# Altium PCB BLDC-2020.PcbDoc (part 2 of 3)
Units mil, origin at the board's own origin, x right, y up, seen from the top; angles counter-clockwise.
Board outline 3000 x 7500 mil, 4 copper layers (Top Layer, GND, Power, Bottom Layer), stack 26.468 mil thick; 202 components, 138 nets, 710 pads, 30 vias.
Unrouted connection lines stored in the file: 399.
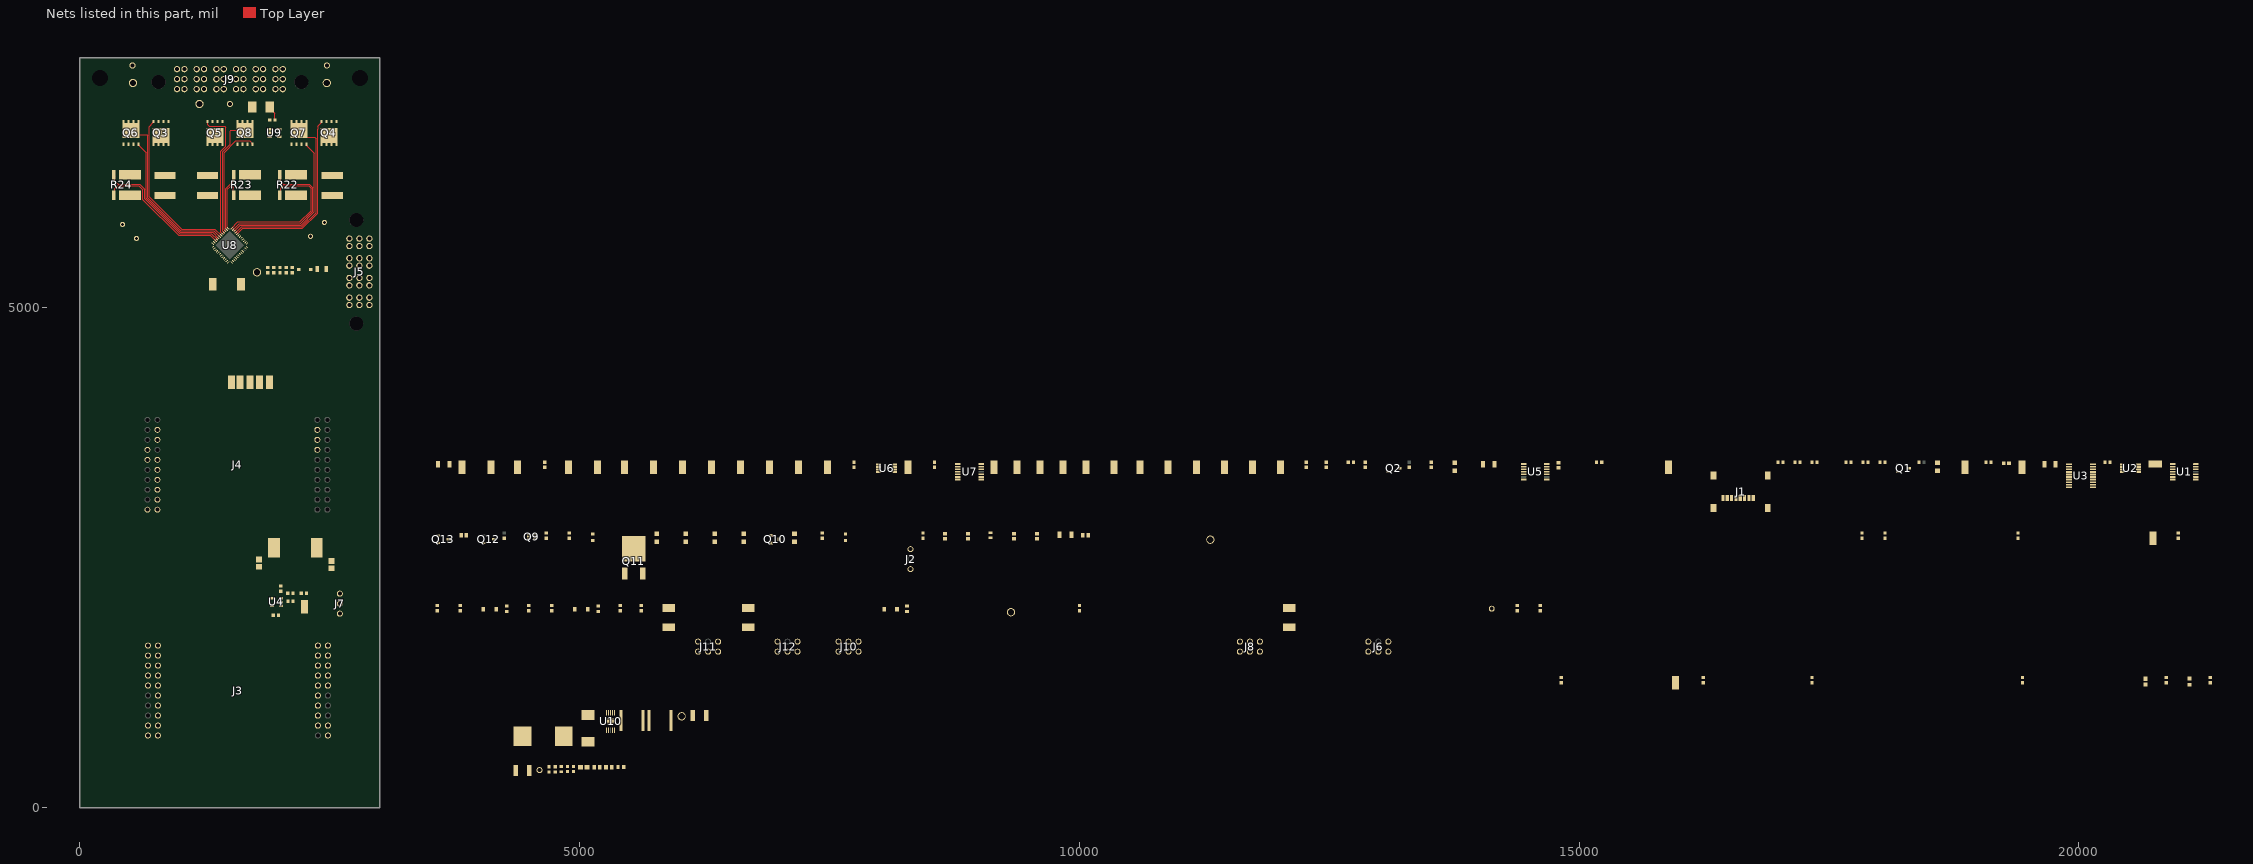
[diagram p3: the nets of this part, all layers, seen from the top]

## Part data (continued)
C27 C28: library part CMP-2000-05259-1, "CAP, Ceramic, 100 uF, 20%, 6.3 V, 1210, RoHS, Tape and Reel", Dielectric=X5R, Manufacturer=MurataElectronics, Operating Temperature=-55to85degC, Package/Case=1210, Package Description="2-Pin Surface Mount Device, Body 3.2 x 2.5 mm", Tolerance=20%, Voltage=6.3Vdc, Capacitance Value=100uF, Category=CapacitorCeramicMultilayer, ClassName="5V Regulator", Construction=Flat, Datasheet URL=https://datasheet.ciiva.com/29199/455114-da-01-en-vs-kondensator-1210-29199468.pdf, Datasheet Version=Dec-10, Manufacturer URL=http://www.murata.com/, Mounting=SurfaceMount, Package Reference=1210, Product Depth=2.5mm, Product Height=2.5mm, Product Length=3.2mm, Rad Hard=No, Type=Flat
C29 C30: library part CMP-2000-06059-1, "Chip Capacitor, 10 uF, +/- 20%, 100 V, -55 to 125 degC, 2220 (5750 Metric), RoHS, Tape and Reel", Capacitance=10µF, Manufacturer=TDK, Operating Temperature=-55°C~125°C, Package / Case=2220(5750Metric), Package Description="SMD, 2-Leads, Body 6.1 x 5.4 mm", Package Reference=C5750-2, PCN Part Number=MLCCPartNumberChange30/Nov/2012, Ratings=-, Standard Package=1, Temperature Coefficient=X7S, Tolerance=±20%, Voltage - Rated=100V, Applications=GeneralPurpose, Catalog Drawings=CSERIES_2220_2.5, Category=Capacitors, ClassName="5V Regulator", Datasheet URL=https://datasheet.ciiva.com/24216/c5750x7s2a106m230kb-265716-24216594.pdf, Datasheet Version=09/2013, Family=CeramicCapacitors, Featured Product=Compact,High-CapacitanceMultilayerCeramicChipCapacitorsMidVoltageX7S-100VMLCCsC-SeriesMidVoltageMLCCs, Features=-, Height - Seated (Max)=-, Kits=445-9009-KIT-ND-KITCAPCERHICAP100V-630VSMDSAMPLEKIT1008-ND-KITCAPCERMLCC100V-630V, Lead Spacing=-, Lead Style=-, Manufacturer URL=http://www.tdk.com/, Mounting Technology=SurfaceMount, Mounting Type=SurfaceMount,MLCC, Online Catalog=CSeries,MidVoltage, Other Names=445-5212-1, Packaging=CutTape(CT), Product Training Modules=SEAT,CCV,andTVCLDesignToolsCSeriesMidVoltageCapacitorsFamilyGuidetoReplacinganElectrolyticCapacitorwithanMLCC, RoHS Information=RoHSCertificate-MLCC, Series=C, Size / Dimension="0.224\"Lx0.197\"W(5.70mmx5.00mm)", Thickness (Max)="0.098\"(2.50mm)"
C32: library part CMP-2006-02483-1, Manufacturer=Murata, Part Number=GRM188R72A472KA01D, ClassName="5V Regulator"
C33: library part CMP-2006-02064-1, Manufacturer="AVX Interconnect / Elco", Part Number=06035C271KAT2A, ClassName="5V Regulator"
C34 C35: library part EGPD800ELL391MK25H, "CAP ALUM 390UF 20% 80V RADIAL", Case/Package=Radial, ESR (Equivalent Series Resistance)=52mR, Manufacturer 1="United Chemi-Con", Max Operating Temperature=135°C, Min Operating Temperature=-40°C, Package Quantity=1000, Ripple Current=2.05A, Tolerance=20%, Voltage Rating=80V, Capacitance=390uF, ComponentLink1Description=https://datasheet.ciiva.com/31836/76cat-db-al-cgieejppdfnamegpd-cgieejppdfnamegpd-31836902.pdf?src-supplier=Onlinecomponents.com, ComponentLink1URL=https://datasheet.ciiva.com/31836/76cat-db-al-cgieejppdfnamegpd-cgieejppdfnamegpd-31836902.pdf?src-supplier=Onlinecomponents.com, Diameter=12.5mm, Height=12.5mm, Height - Seated (Max)=1.043inch, Lead/Base Style=Straight, Lead Pitch=0.197inch, Length=25mm, Life (Hours)=3000Hour, Manufacturer Part Number 1=EGPD800ELL391MK25H, Mount="Through Hole", Packaging=Bulk, Pricing 1="1=1.62000, 10=1.28300, 100=0.96200, 500=0.72684, 1000=0.64133, 2500=0.59857, 5000=0.58147 (USD)", RoHS=Yes, Stock 1=4261, Supplier 1=Digi-Key, Termination=Radial, Voltage Rating (DC)=80V, Width=12.5mm
C36 C37: library part CMP-2007-01021-1, Manufacturer=Kemet, Part Number=C0805C226M9PAC7800
C38 C39 C40: library part C0603C473K5RACTU, "Multilayer Ceramic Capacitor, C Series, 0.047 - F, - 10%, X7R, 50 V, 0603 [1608 Metric] ;RoHS Compliant: Yes", Case/Package=0603, Case Code (Metric)=1608, Dielectric=X7R, Dielectric Material=Ceramic, Manufacturer 1=KEMET, Max Operating Temperature=125°C, Min Operating Temperature=-55°C, Package Quantity=1, Tolerance=10%, Voltage=50V, Capacitance=47nF, Case Code (Imperial)=0603, ComponentLink1Description=https://datasheet.ciiva.com/6074/1776093-6074329.pdf?src-supplier=Farnell, ComponentLink1URL=https://datasheet.ciiva.com/6074/1776093-6074329.pdf?src-supplier=Farnell, ComponentLink2Description=https://datasheet.ciiva.com/28682/1851736-28682298.pdf?src-supplier=Element14, ComponentLink2URL=https://datasheet.ciiva.com/28682/1851736-28682298.pdf?src-supplier=Element14, ComponentLink3Description=https://datasheet.ciiva.com/7823/1776093-7823803.pdf?src-supplier=Element14, ComponentLink3URL=https://datasheet.ciiva.com/7823/1776093-7823803.pdf?src-supplier=Element14, ComponentLink4Description=https://datasheet.ciiva.com/18193/getdatasheetpartid-94279-18193115.pdf?src-supplier=Verical, ComponentLink4URL=https://datasheet.ciiva.com/18193/getdatasheetpartid-94279-18193115.pdf?src-supplier=Verical, ComponentLink5Description=https://datasheet.ciiva.com/7823/1776093-7823804.pdf?src-supplier=Element14, ComponentLink5URL=https://datasheet.ciiva.com/7823/1776093-7823804.pdf?src-supplier=Element14, Depth=0.8mm, Dissipation Factor=2.5%, Height=0.8mm, Lead Pitch=0.7mm, Length=1.6mm, Manufacturer Part Number 1=C0603C473K5RACTU, Mount="Surface Mount,PCB", Number of Pins=2, Packaging="Tape and Reel", Pricing 1="1=0.12000, 10=0.08800, 100=0.04130, 500=0.02896, 1000=0.02397 (USD)", Radiation Hardening=No, REACH SVHC="No SVHC", RoHS=Yes, Stock 1=340857, Supplier 1=Digi-Key, Termination=SMD/SMT, Thickness=0.034inch, Voltage Rating=50V, Voltage Rating (DC)=50V, Width=0.8mm
D1: library part CMP-1060-00146-1, "3 W Zener Voltage Regulator, 2-Pin SMB, Pb-Free, Tape and Reel", Manufacturer="On Semiconductor", ClassName=FETBridge, ComponentLink1Description="Manufacturer URL", ComponentLink1URL=http://www.onsemi.com/, ComponentLink2Description=Datasheet, ComponentLink2URL=http://www.onsemi.com/pub_link/Collateral/1SMB5913BT3-D.PDF, ComponentLink3Description="Package Specification", ComponentLink3URL=http://www.onsemi.com/pub_link/Collateral/1SMB5913BT3-D.PDF, DatasheetVersion="Rev. 8", Mounting Technology="Surface Mount", PackageDescription="2-Pin Small Molded Package, J-Bend Lead, Body 4.33 x 3.625 mm", PackageReference=SMB-2-403A-03_H, PackageVersion="Rev. H, 05/2011", Packing="Tape and Reel", PartNumber=1SMB5936BT3G, RoHS=Pb-Free, VZ Typ (V)=30
D2: "NEXPERIA - PMEG6010CEH,115 - DIODE, SCHOTTKY, 1A, 60V, SOD-123F", Manufacturer 1=Nexperia, ClassName="3.3V Regulator", ComponentLink1Description=https://www.mouser.com/ds/2/302/PMEG6010CEH_PMEG6010CEJ-102368.pdf?src-supplier=Mouser, ComponentLink1URL=https://www.mouser.com/ds/2/302/PMEG6010CEH_PMEG6010CEJ-102368.pdf?src-supplier=Mouser, ComponentLink2Description=http://www.farnell.com/datasheets/109684.pdf?src-supplier=Farnell, ComponentLink2URL=http://www.farnell.com/datasheets/109684.pdf?src-supplier=Farnell, ComponentLink3Description=https://assets.nexperia.com/documents/data-sheet/PMEG6010CEH_PMEG6010CEJ.pdf?src-supplier=Digi-Key, ComponentLink3URL=https://assets.nexperia.com/documents/data-sheet/PMEG6010CEH_PMEG6010CEJ.pdf?src-supplier=Digi-Key, Manufacturer Part Number 1=PMEG6010CEH,115, Pricing 1="1=0.46000, 10=0.34400, 100=0.21410, 500=0.14650, 1000=0.11269 (USD)", RoHS=No, Stock 1=154416, Supplier 1=Digi-Key
D3: library part CMP-2000-05889-1, "High Voltage Schottky Barrier Rectifier, 100 V, 3 A, -55 to 125 degC, 2-Pin SMD, RoHS, Tape and Reel", If - Forward Current=3A, Ifsm - Forward Surge Current=100A, Ir - Reverse Current=500uA, Manufacturer=DiodesIncorporated, Maximum Operating Temperature=+125C, Minimum Operating Temperature=-55C, Operating Temperature Range=-55Cto+125C, Package / Case=SMC, Package Description="2-Pin Surface Mount Device, Body 5.905 x 6.855 mm", Vf - Forward Voltage=0.79V, Vrrm - Repetitive Reverse Voltage=100V, Brand=DiodesIncorporated, ClassName="5V Regulator", Configuration=Single, Datasheet URL=http://www.diodes.com/_files/datasheets/ds30020.pdf, Datasheet Version="Rev. 13-2, 09/2010", Factory Pack Quantity=3000, Height=2.5mm, Length=7.11mm, Manufacturer URL=http://www.diodes.com/, Mounting Style=SMD/SMT, Mounting Technology=SurfaceMount, Package Reference=SMC, Packaging=Reel, Product=SchottkyDiodes, Product Category=SchottkyDiodes&Rectifiers, RoHS=True, Series=B3100, Technology=Si, Termination Style=SMD/SMT, Type=SchottkyBarrierRectifier, Unit Weight=0.007408oz, Width=6.22mm
D4 D5 D6: library part CMP-1060-00363-1, "Zener Voltage Regulator, 500 mW, 2-Pin SOD-123, Pb-Free, Tape and Reel", Manufacturer="On Semiconductor", ComponentLink1Description="Manufacturer URL", ComponentLink1URL=http://www.onsemi.com/, ComponentLink2Description=Datasheet, ComponentLink2URL=http://www.onsemi.com/pub_link/Collateral/MMSZ5221BT1-D.PDF, ComponentLink3Description="Package Specification", ComponentLink3URL=http://www.onsemi.com/pub_link/Collateral/425-04.PDF, DatasheetVersion="Rev. 12", Mounting Technology="Surface Mount", PackageDescription="2-Pin SOD, Body 1.6 x 2.69 mm", PackageReference=SOD-123-2-425-04, PackageVersion="Rev. G, 10/2009", Packing="Tape and Reel", PartNumber=MMSZ5226BT1G, P Max (W)=0.5, RoHS=Pb-Free, VZ Typ (V)=3.3
F1: library part CMP-2000-06806-1, "PolySwitch Resettable Device, 6 V, 1.5 A, -40 to 85 degC, 2-Pin SMD, RoHS, Tape and Reel", Manufacturer=TEConnectivity/CircuitProtection, Maximum Current Rating=100A, Maximum Initial Resistance=N/A, Maximum Post Trip Resistance=0.11Ohm, Maximum Voltage Rating=6VDC, Minimum Initial Resistance=0.04Ohm, Operating Temperature=85(Max)C, Package/Case=1206, Package Description="2-Pin Surface Mount Device, Body 3.2 x 1.585 mm", Package Reference=NANOSMDC150F-2, Trip Current=3A, Typical Power Dissipation=0.8(Max)W, Agency Approvals=CSA,TUV,UL, Applications=N/A, Datasheet URL=http://www.te.com/commerce/DocumentDelivery/DDEController?Action=showdoc&DocId=Catalog+Section%7FCLP00010%7FA%7Fpdf%7FEnglish%7FENG_CS_CLP00010_A_CLP00010.pdf%7FRF1359-000, Datasheet Version=11/2013, Dimension=3.4(Max)x1.8(Max)x0.89(Max)mm, Family=NANOSMD, Hold Current=1.5A, Lead Diameter=N/R, Manufacturer URL=http://www.te.com/, Maximum Trip Time=0.3@8As, Mounting=SurfaceMount, Mounting Technology=SurfaceMount, Number of Terminals=2, Packaging=TapeandReel, Part No=NANOSMDC150F-2, RoHS=Yes, Seated Plane Height=N/R, Terminal Pitch=N/A, Wire Form=N/R
F2 F3 F4: library part CMP-2000-05631-1, "Fuse, 125 V, 500 mA, -55 to 125 degC, 2-Pin SMD, RoHS, Tape and Reel", Current Rating=0.5A, Manufacturer=Littelfuse, Operating Temp Range=-55to+125°C, Package Description="2-Pin Surface Mount Device, Body 6.1 x 2.69 mm", Package Reference=45X, Working Voltage-Max=125V, Datasheet URL=http://www.littelfuse.com/products/fuses/surface-mount-fuses/nano-2-fuses/~/media/electronics/datasheets/fuses/littelfuse_fuse_451_453_datasheet.pdf.pdf, Datasheet Version=02/2016, Manufacturer URL=http://www.littelfuse.com/, Mounting Technology=SurfaceMount, Response Characteristic=VeryFastActing, Size=6.10x2.69mm
J1: library part CMP-1502-00164-1, "WR-CRD Micro SD Card Connector, Hinge Type", Manufacturer="Wurth Elektronik", Operating Temperature=-25to85degC, Rated Current=0.5A, Withstanding Voltage=500VAC, Working Voltage=100VAC, Datasheet URL=https://katalog.we-online.de/em/datasheet/693072010801.pdf, Manufacturer URL=http://www.we-online.de, Mounting Technology=SMT, Package Reference=693072010801, Packaging=TapeandReel, Part Number=693072010801, Publisher=WurthElektronik
J2 J7: "CONN HEADER R/A 3POS 2.54MM", Manufacturer 1=Samtec, Max Current Rating=7.4A, Max Operating Temperature=125°C, Max Voltage Rating (AC)=675V, Min Operating Temperature=-55°C, ComponentLink1Description=http://www.farnell.com/datasheets/2607185.pdf?src-supplier=Farnell, ComponentLink1URL=http://www.farnell.com/datasheets/2607185.pdf?src-supplier=Farnell, ComponentLink2Description=http://components.arrow.com/part/dataview/0323_03818136?src-supplier=Arrow+Europe, ComponentLink2URL=http://components.arrow.com/part/dataview/0323_03818136?src-supplier=Arrow+Europe, ComponentLink3Description=http://www.samtec.com/documents/webfiles/pdf/ipl1.pdf?src-supplier=Avnet+Europe, ComponentLink3URL=http://www.samtec.com/documents/webfiles/pdf/ipl1.pdf?src-supplier=Avnet+Europe, ComponentLink4Description=http://www.samtec.com/documents/webfiles/pdf/ipl1.pdf?src-supplier=Avnet, ComponentLink4URL=http://www.samtec.com/documents/webfiles/pdf/ipl1.pdf?src-supplier=Avnet, ComponentLink5Description=http://www.farnell.com/datasheets/2607185.pdf?src-supplier=Newark, ComponentLink5URL=http://www.farnell.com/datasheets/2607185.pdf?src-supplier=Newark, ComponentLink6Description=http://suddendocs.samtec.com/prints/ipl1-1xx-xx-xxx-s-xx-x-xx-mkt.pdf?src-supplier=Digi-Key, ComponentLink6URL=http://suddendocs.samtec.com/prints/ipl1-1xx-xx-xxx-s-xx-x-xx-mkt.pdf?src-supplier=Digi-Key, Contact Material=Bronze, Contact Plating=Gold, Depth=9.65mm, Gender=Male, Housing Material=Polymer, Length=9.14mm, Manufacturer Part Number 1=IPL1-103-01-L-S-RA-K, Mount="Through Hole", Number of Contacts=3, Number of Ports=1, Number of Terminals=3, Orientation="Right Angle", Packaging=Bulk, Pitch=2.54mm, Pricing 1="1=2.59000, 10=2.34700, 100=2.01180, 500=1.67650, 1000=1.43700, 5000=1.27414 (USD)", Radiation Hardening=No, RoHS=Yes, Stock 1=209, Supplier 1=Digi-Key, Termination=Solder
J3 J4: "Designed to fit a TI luanchpad board or expansion board"
J5: "SAMTEC - MPT-04-01-01-L-RA-SD - HEADER, 4WAY, POWER, R/A", Current Rating=34.8A, Manufacturer 1=Samtec, Max Operating Temperature=125°C, Max Voltage Rating (AC)=600V, Min Operating Temperature=-55°C, Voltage Rating=848V, ComponentLink1Description=https://datasheet.ciiva.com/7997/452746-7997632.pdf?src-supplier=Element14, ComponentLink1URL=https://datasheet.ciiva.com/7997/452746-7997632.pdf?src-supplier=Element14, ComponentLink2Description=https://datasheet.ciiva.com/25617/0900766b81157edd-25617154.pdf?src-supplier=RSComponents, ComponentLink2URL=https://datasheet.ciiva.com/25617/0900766b81157edd-25617154.pdf?src-supplier=RSComponents, ComponentLink3Description=https://datasheet.ciiva.com/9446/mps-ra-9446008.pdf?src-supplier=Avnet, ComponentLink3URL=https://datasheet.ciiva.com/9446/mps-ra-9446008.pdf?src-supplier=Avnet, Contact Material="Copper Alloy,Copper", Contact Plating=Gold, Depth=14.81mm, Gender=Male, Housing Material=Polymer, Lead Pitch=5mm, Length=31.36mm, Manufacturer Part Number 1=MPT-04-01-01-L-RA-SD, Mount="Through Hole", Number of Contacts=4, Number of Ports=1, Number of Rows=1, Number of Terminals=32, Orientation="Right Angle", Packaging=Bulk, Pitch=5mm, Pricing 1="1=5.98000, 48=5.25792, 144=4.78000, 528=4.06299, 1008=3.46550 (USD)", Radiation Hardening=No, REACH SVHC="No SVHC", RoHS=Yes, Stock 1=186, Supplier 1=Digi-Key, Termination=Solder
J6 J8 J10 J11 J12: "Terminal Assembly, Double Row, Right Angle, Thru-Hole, 0.100\" x 0.100\" Pitch, 6Pins", Manufacturer=SAMTEC, CREATED="July 16, 2014 - Wendy Xin", PCB DECAL=IPL1-103-01-XXX-D-RA
J9: "Conn Mini-Power Terminal Strip HDR 6 POS Solder RA Thru-Hole 36 Terminal 1 Port", Manufacturer 1=Samtec, Max Operating Temperature=125°C, Max Voltage Rating (AC)=600V, Min Operating Temperature=-55°C, Voltage Rating=848V, ComponentLink1Description=https://datasheet.ciiva.com/25617/0900766b81157edd-25617181.pdf?src-supplier=RSComponents, ComponentLink1URL=https://datasheet.ciiva.com/25617/0900766b81157edd-25617181.pdf?src-supplier=RSComponents, ComponentLink2Description=https://datasheet.ciiva.com/16677/mps-ra-16677806.pdf?src-supplier=Avnet+Europe, ComponentLink2URL=https://datasheet.ciiva.com/16677/mps-ra-16677806.pdf?src-supplier=Avnet+Europe, Contact Material="Copper Alloy,Copper", Contact Plating=Gold, Depth=14.81mm, Gender=Male, Housing Material=Polymer, Lead Pitch=5mm, Manufacturer Part Number 1=MPT-06-01-01-L-RA-SD, Mount="Through Hole", Number of Contacts=6, Number of Ports=1, Number of Rows=1, Number of Terminals=36, Orientation="Right Angle", Packaging=Bulk, Pitch=5mm, Pricing 1="1=7.27000, 48=6.36292, 144=5.75701, 528=4.84799, 1008=4.24200 (USD)", Radiation Hardening=No, REACH SVHC="No SVHC", RoHS=Yes, Stock 1=373, Supplier 1=Digi-Key, Termination=Solder
L1: library part CMP-0226-00043-1, "SMD Flat Wire High Current Inductor WE-HCI, L=22.0 µH", Inductance="22.0 µH", ClassName="5V Regulator", ComponentLink1Description="Manufacturer Link", ComponentLink1URL=http://www.we-online.com, ComponentLink2Description=Datasheet, ComponentLink2URL=http://www.we-online.de/katalog/media/pdf/7443551221.pdf, DatasheetVersion="ver 1, Aug-2009", PackageDescription="Inductor, 2-Leads, Body 13.2 x 12.8 mm", PackageReference=WE-HCI-1365, PackageVersion=2008
L2: library part SRU8043-330Y, "Fixed Inductors 33uH 30% SMD 8043", Case/Package=Nonstandard, Current Rating=1.7A, DC Resistance (DCR)=100mR, Manufacturer 1=Bourns, Max Operating Temperature=125°C, Min Operating Temperature=-40°C, Package Quantity=1000, Saturation Current=1.4A, Self Resonant Frequency=11MHz, Test Frequency=100kHz, Tolerance=30%, ClassName="3.3V Regulator", ComponentLink1Description=https://datasheet.ciiva.com/4959/sru8043-34397-4959893.pdf?src-supplier=Mouser, ComponentLink1URL=https://datasheet.ciiva.com/4959/sru8043-34397-4959893.pdf?src-supplier=Mouser, ComponentLink2Description=https://datasheet.ciiva.com/6708/sru8043-6708554.pdf?src-supplier=Digi-Key, ComponentLink2URL=https://datasheet.ciiva.com/6708/sru8043-6708554.pdf?src-supplier=Digi-Key, ComponentLink3Description=https://datasheet.ciiva.com/48684/sru8043-48684874.pdf?src-supplier=Avnet, ComponentLink3URL=https://datasheet.ciiva.com/48684/sru8043-48684874.pdf?src-supplier=Avnet, ComponentLink4Description=https://datasheet.ciiva.com/41680/70887-41680748.pdf?src-supplier=Newark, ComponentLink4URL=https://datasheet.ciiva.com/41680/70887-41680748.pdf?src-supplier=Newark, Composition=Wirewound, Core Material=Ferrite, DC Current=1.7A, Depth=8.3mm, Height=0.169inch, Height - Seated (Max)=0.181inch, Inductance=33uH, Length=0.315inch, Manufacturer Part Number 1=SRU8043-330Y, Max DC Current=1.7A, Military Standard=Not, Mount="Surface Mount", Number of Pins=2, Packaging="Tape and Reel", Pricing 1="1=0.97000, 10=0.89700, 100=0.64860, 500=0.49680 (USD)", Q Factor=21, RoHS=Yes, Shielding=Shielded, Stock 1=3183, Supplier 1=Digi-Key, Termination=SMD/SMT, Width=0.315inch
L3: library part DR125-124-R, "Fixed Inductors 120 000uH 0.069A 150ohms", Case/Package=120, Current=60A, Current Rating=60mA, DC Resistance (DCR)=150R, Inductance=120mH, Manufacturer 1="Eaton Bussmann", Max DC Current=69mA, Max Operating Temperature=125°C, Min Operating Temperature=-40°C, Package Quantity=600, Saturation Current=58A, Test Frequency=100kHz, Tolerance=20%, ComponentLink1Description=https://datasheet.ciiva.com/16291/4a32919a-7470-4ae0-be45-b59e3a1351ef-16291744.pdf?src-supplier=Future+Electronics, ComponentLink1URL=https://datasheet.ciiva.com/16291/4a32919a-7470-4ae0-be45-b59e3a1351ef-16291744.pdf?src-supplier=Future+Electronics, ComponentLink2Description=https://datasheet.ciiva.com/4958/bus-elx-ds-4315-dr-series-4958109.pdf?src-supplier=Mouser, ComponentLink2URL=https://datasheet.ciiva.com/4958/bus-elx-ds-4315-dr-series-4958109.pdf?src-supplier=Mouser, Core Material=Ferrite, DC Current=60mA, Depth=12.5mm, Height=6mm, Lead Free="Lead Free", Length=12.5mm, Manufacturer Part Number 1=DR125-124-R, Military Standard=Not, Mount="Surface Mount", Number of Pins=2, Packaging="Tape and Reel", Pricing 1="1=1.95000, 10=1.80100, 100=1.26060 (USD)", RoHS=Yes, Shielding=Shielded, Stock 1=1520, Supplier 1=Digi-Key, Termination=SMD/SMT, Weight=0.016oz, Width=0.492inch
LED1 LED2 LED4 LED5 LED6 LED7 LED8: library part CMP-1426-00007-1, "SMD mono-color Chip LED, WL-SMCW, Green", Color=Green, Manufacturer="Wuerth Elektronik", ComponentLink1Description="Manufacturer URL", ComponentLink1URL=http://www.we-online.com, ComponentLink2Description=Datasheet, ComponentLink2URL=http://katalog.we-online.com/led/datasheet/150080GS75000.pdf, PackageReference=0805_A, PartNumber=150080GS75000
LED3 LED9: library part CMP-1426-00006-1, "SMD mono-color Chip LED, WL-SMCW, Bright Green", Color="Bright Green", Manufacturer="Wuerth Elektronik", ComponentLink1Description="Manufacturer URL", ComponentLink1URL=http://www.we-online.com, ComponentLink2Description=Datasheet, ComponentLink2URL=http://katalog.we-online.com/led/datasheet/150060VS75000.pdf, PackageReference=0603_A, PartNumber=150060VS75000
Q1 Q2 Q12 Q13: "MOSFET N-CH 12V 9.3A SC59", Capacitance=2.426E-09F, Case/Package=TO-236-3, Continuous Drain Current (ID)=9.3A, Drain to Source Breakdown Voltage=12V, Drain to Source Resistance=41mR, Gate to Source Voltage (Vgs)=4.5V, Input Capacitance=2.426nF, Manufacturer 1=Diodes, Max Operating Temperature=150°C, Max Power Dissipation=680mW, Min Operating Temperature=-55°C, Package Quantity=3000, ComponentLink1Description=http://www.mouser.com/ds/2/115/DMN1019USN-336718.pdf?src-supplier=Mouser, ComponentLink1URL=http://www.mouser.com/ds/2/115/DMN1019USN-336718.pdf?src-supplier=Mouser, ComponentLink2Description=https://www.diodes.com/assets/Datasheets/DMN1019USN.pdf?src-supplier=Digi-Key, ComponentLink2URL=https://www.diodes.com/assets/Datasheets/DMN1019USN.pdf?src-supplier=Digi-Key, Drain to Source Voltage (Vdss)=12V, Element Configuration=Single, Fall Time=16.8ns, Lead Free="Lead Free", Manufacturer Part Number 1=DMN1019USN-7, Mount="Surface Mount", Number of Channels=1, Packaging="Tape and Reel", Pricing 1="1=0.44000, 10=0.35400, 100=0.24130, 500=0.18096, 1000=0.13572 (USD)", Rds On Max=10mR, Rise Time=57.6ns, RoHS=Yes, Stock 1=30621, Supplier 1=Digi-Key, Turn-Off Delay Time=22.2ns, Turn-On Delay Time=7.6ns, Weight=0.000282oz
Q3 Q4 Q5 Q6 Q7 Q8: "MOSFET N-CH 60V 100A 8TDSON", Manufacturer 1=Infineon, ClassName=FETBridge, ComponentLink1Description=https://www.infineon.com/dgdl/Infineon-BSC027N06LS5-DS-v02_00-EN.pdf?fileId=5546d46258fc0bc101596e1c881234d6&src-supplier=Digi-Key, ComponentLink1URL=https://www.infineon.com/dgdl/Infineon-BSC027N06LS5-DS-v02_00-EN.pdf?fileId=5546d46258fc0bc101596e1c881234d6&src-supplier=Digi-Key, Manufacturer Part Number 1=BSC027N06LS5ATMA1, Pricing 1="1=2.07000, 10=1.85900, 100=1.49430, 500=1.22768, 1000=1.01722 (USD)", RoHS=No, Stock 1=3937, Supplier 1=Digi-Key
Q9: library part CMP-1259-00353-1, "N/P-Channel Trench MOSFET, 30 / -30 V, 400 / -220 mA, -55 to 150 degC, 6-Pin SOT666, Tape and Reel", Manufacturer="NXP Semiconductors", Automotive Qualified=Y, Channel Type=N/P, ComponentLink1Description="Manufacturer URL", ComponentLink1URL=http://www.nxp.com/, ComponentLink2Description=Datasheet, ComponentLink2URL=http://www.nxp.com/documents/data_sheet/NX3008CBKV.pdf, ComponentLink3Description="Package Specification", ComponentLink3URL=http://www.nxp.com/documents/outline_drawing/sot666_po.pdf, DatasheetVersion="Rev. 1", Mounting Technology="Surface Mount", PackageDescription="6-Pin Small Outline Transistor Package, Body 1.6 x 1.2 mm, Pitch 0.5 mm", PackageReference=SOT666, PackageVersion="06-03-16, 03/2006", Packing="Tape & Reel", PartNumber=NX3008CBKV,115
Q10: library part CMP-1058-00754-1, "Trench Power MOSFET, -20 V, Single P-Channel, 3-Pin SOT-23, Pb-Free, Tape and Reel", Manufacturer="On Semiconductor", Package Type=SOT-23-3, Channel Polarity="P Channel", Ciss Typ (pF)=675, ComponentLink1Description="Manufacturer URL", ComponentLink1URL=http://www.onsemi.com/, ComponentLink2Description=Datasheet, ComponentLink2URL=http://www.onsemi.cn/pub_link/Collateral/NTR4101P-D.PDF, ComponentLink3Description="Package Specification", ComponentLink3URL=http://www.onsemi.cn/pub_link/Collateral/318-08.PDF, Configuration=Single, Coss Typ (pF)=100, Crss Typ (pF)=75, DatasheetVersion="Rev. 9", ID Max (A)=3.2, Mounting Technology="Surface Mount", PackageDescription="3-Pin Small Outline Transistor, Body 2.92 x 1.3 mm, Pitch 0.95 mm", PackageReference=SOT-23-3-318-08, PackageVersion="Rev. AP, 11/2009", Packing="Tape and Reel", PartNumber=NTR4101PT1G, Qrr Typ (nC)=1008, RoHS=Pb-Free, V(BR)DSS Min (V)=20, VGS(th) Max (V)=1.2, VGS Max (V)=8
Q11: "Trans MOSFET N-CH 250V 7.4A 3-Pin(2+Tab) DPAK T/R", Case/Package=TO-252-3, Continuous Drain Current (ID)=7.4A, Drain to Source Breakdown Voltage=250V, Drain to Source Resistance=420mR, Gate to Source Voltage (Vgs)=30V, Input Capacitance=700pF, Manufacturer="ON Semiconductor / Fairchild", Max Operating Temperature=150°C, Max Power Dissipation=2.5W, Min Operating Temperature=-55°C, Package Quantity=2500, ComponentLink1Description=https://www.fairchildsemi.com/tape-and-reel-drawings/PKG-TO252A03.pdf, ComponentLink1URL=https://www.fairchildsemi.com/tape-and-reel-drawings/PKG-TO252A03.pdf, ComponentLink2Description=https://www.fairchildsemi.com/datasheets/FQ/FQD9N25.pdf, ComponentLink2URL=https://www.fairchildsemi.com/datasheets/FQ/FQD9N25.pdf, Drain to Source Voltage (Vdss)=250V, Element Configuration=Single, Fall Time=45ns, Manufacturer Part Number=FQD9N25TM_F080, Mount="Surface Mount", Number of Pins=3, Packaging="Tape and Reel", Power Dissipation=2.5W, Pricing 1="1=1.77, 10=1.563, 100=1.2355, 500=0.95816, 1000=0.75644 (USD)", Radiation Hardening=No, Rds On Max=420mR, Rise Time=105ns, Stock 1=2322, Supplier 1=Digi-Key, Turn-Off Delay Time=25ns, Turn-On Delay Time=13ns, Weight=0.26037g
R1 R11 R17: library part CMP-2100-03681-1, "Chip Resistor, 0 Ohm, +/- 5%, -55 to 155 degC, 1206 (3216 Metric), RoHS, Tape and Reel", Case/Package=1206, Case Code (Metric)=3216, Manufacturer=Yageo, Max Operating Temperature=155degC, Max Power Dissipation=250mW, Min Operating Temperature=-55degC, Package Description="2-Pin Surface Mount Device, Body 3.1 x 1.6 mm", Package Quantity=5000, Package Reference=1206.0, Resistance=0mOhm, Temperature Coefficient=200ppm/degreesC, Tolerance=5%, Voltage Rating=200V, Case Code (Imperial)=1206, Composition=CarbonFilm, Contact Plating=Tin, Datasheet URL=http://www.yageo.com/documents/recent/PYu-RC_Group_51_RoHS_L_5.pdf, Datasheet Version="Rev. 5, 10/2016", Depth=1.6mm, Height=0.026inch, Lead Free=LeadFree, Length=3.1mm, Manufacturer URL=http://www.yageo.com/, Military Standard=Not, Number of Terminations=2, Packaging=TapeandReel, Power Rating=250mW, Radiation Hardening=No, REACH SVHC=Unknown, RoHSCompliant=true, Termination=SMD/SMT, Width=0.063inch
R2 R10 R36 R37 R39 R40: library part CMP-2000-01951-1, Manufacturer=Susumu, Part Number=RG1608N-910-B-T5
R3 R13 R41 R43 R44 R45: library part RR0816P-101-D, "RES SMD 100 OHM 0.5% 1/16W 0816", Case/Package=0603, Case Code (Metric)=1608, Manufacturer=Susumu, Max Operating Temperature=125°C, Max Power Dissipation=63mW, Min Operating Temperature=-55°C, Package Quantity=1, Resistance=100R, Temperature Coefficient=25ppm/°C, Tolerance=0.5%, Voltage Rating=75V, Case Code (Imperial)=0603, ComponentLink1Description=http://www.susumu.co.jp/common/pdf/n_catalog_partition05_en.pdf, ComponentLink1URL=http://www.susumu.co.jp/common/pdf/n_catalog_partition05_en.pdf, ComponentLink2Description=http://documents.rs-components.com/techlib://itc_doclist_GB.htm?stockno=3915191, ComponentLink2URL=http://documents.rs-components.com/techlib://itc_doclist_GB.htm?stockno=3915191, Composition="Thin Film", Depth=0.8mm, Height=0.4mm, Lead Free="Lead Free", Length=1.6mm, Manufacturer Part Number=RR0816P-101-D, Number of Pins=2, Number of Terminations=2, Packaging="Cut Tape", Power Rating=63mW, Pricing 1="1 = 0.11000, 10 = 0.09800, 100 = 0.03760, 1000 = 0.01654, 2500 = 0.01428 (USD)", REACH SVHC=Unknown, RoHS=Yes, Stock 1=167672, Supplier 1=Digi-Key, Termination=SMD/SMT, Voltage Rating (DC)=75V, Weight=7.1E-05oz, Width=0.031inch
R4 R5 R12 R14 R15 R16 R18 R19 R20 R21 R26 R42 R47 R48: library part RR0816P-103-D, "RES SMD 10K OHM 0.5% 1/16W 0816", Case/Package=0603, Case Code (Metric)=1608, Manufacturer=Susumu, Max Operating Temperature=125°C, Max Power Dissipation=63mW, Min Operating Temperature=-55°C, Package Quantity=1, Resistance=10kR, Temperature Coefficient=25ppm/°C, Tolerance=0.5%, Voltage Rating=75V, Case Code (Imperial)=0603, ComponentLink1Description=http://documents.rs-components.com/techlib://itc_doclist_GB.htm?stockno=3915321, ComponentLink1URL=http://documents.rs-components.com/techlib://itc_doclist_GB.htm?stockno=3915321, ComponentLink2Description=http://www.susumu.co.jp/common/pdf/n_catalog_partition05_en.pdf, ComponentLink2URL=http://www.susumu.co.jp/common/pdf/n_catalog_partition05_en.pdf, Composition="Thin Film", Depth=0.8mm, Height=0.4mm, Lead Free="Lead Free", Length=1.6mm, Manufacturer Part Number=RR0816P-103-D, Number of Pins=2, Number of Terminations=2, Packaging="Tape and Reel", Power Rating=63mW, Pricing 1="1=0.11, 10=0.098, 100=0.0376, 1000=0.01654, 2500=0.01428 (USD)", REACH SVHC=Unknown, Stock 1=1031099, Supplier 1=Digi-Key, Termination=SMD/SMT, Voltage Rating (DC)=75V, Weight=7.1E-05oz, Width=0.8mm
R6 R7 R28: library part CR0603-JW-104ELF, "BOURNS - CR0603-JW-104ELF - RES, 100K, 5%, 0.1W, 0603, THICK FILM", Case/Package=0603, Case Code (Metric)=1608, Manufacturer 1=Bourns, Max Operating Temperature=155°C, Min Operating Temperature=-55°C, Package Quantity=5000, Power Rating=100mW, Resistance=100kR, Temperature Coefficient=200ppm/°C, Tolerance=5%, Voltage Rating=50V, Case Code (Imperial)=0603, ComponentLink1Description=https://datasheet.ciiva.com/22713/691949-22713239.pdf?src-supplier=Element14, ComponentLink1URL=https://datasheet.ciiva.com/22713/691949-22713239.pdf?src-supplier=Element14, ComponentLink2Description=https://datasheet.ciiva.com/23776/1902866-23776391.pdf?src-supplier=Newark, ComponentLink2URL=https://datasheet.ciiva.com/23776/1902866-23776391.pdf?src-supplier=Newark, ComponentLink3Description=https://datasheet.ciiva.com/16766/70154685-16766760.pdf?src-supplier=Allied+Electronics, ComponentLink3URL=https://datasheet.ciiva.com/16766/70154685-16766760.pdf?src-supplier=Allied+Electronics, ComponentLink4Description=https://datasheet.ciiva.com/9120/chpreztr-9120764.pdf?src-supplier=Avnet, ComponentLink4URL=https://datasheet.ciiva.com/9120/chpreztr-9120764.pdf?src-supplier=Avnet, ComponentLink5Description=https://datasheet.ciiva.com/46383/1791942-46383790.pdf?src-supplier=Element14, ComponentLink5URL=https://datasheet.ciiva.com/46383/1791942-46383790.pdf?src-supplier=Element14, ComponentLink6Description=https://datasheet.ciiva.com/30229/159chpreztr-30229129.pdf?src-supplier=Onlinecomponents.com, ComponentLink6URL=https://datasheet.ciiva.com/30229/159chpreztr-30229129.pdf?src-supplier=Onlinecomponents.com, ComponentLink7Description=https://datasheet.ciiva.com/16935/chpreztr-16935963.pdf?src-supplier=Avnet+Europe, ComponentLink7URL=https://datasheet.ciiva.com/16935/chpreztr-16935963.pdf?src-supplier=Avnet+Europe, ComponentLink8Description=https://datasheet.ciiva.com/5543/chpreztr-5543676.pdf?src-supplier=Mouser, ComponentLink8URL=https://datasheet.ciiva.com/5543/chpreztr-5543676.pdf?src-supplier=Mouser, ComponentLink9Description=https://datasheet.ciiva.com/48692/001055501-da-01-en-smd-wid-cr0603-jw-104elf-100k-ohm-1-10w-48692133.pdf?src-supplier=Conrad, ComponentLink9URL=https://datasheet.ciiva.com/48692/001055501-da-01-en-smd-wid-cr0603-jw-104elf-100k-ohm-1-10w-48692133.pdf?src-supplier=Conrad, Composition="Thick Film", Contact Plating=Tin, Depth=0.8mm, Height=0.45mm, Length=1.6mm, Manufacturer Part Number 1=CR0603-JW-104ELF, Military Standard=Not, Mount="Surface Mount", Number of Pins=2, Packaging="Tape and Reel", Pricing 1="1=0.10000, 10=0.01500, 25=0.01080, 50=0.00840, 100=0.00610, 250=0.00468, 500=0.00374, 1000=0.00275 (USD)", Radiation Hardening=No, REACH SVHC="No SVHC", RoHS=Yes, Stock 1=49390, Supplier 1=Digi-Key, Termination=SMD/SMT, Thickness=457um, Voltage Rating (DC)=50V, Width=0.8mm, Working Voltage=50V
  R28: ClassName="3.3V Regulator"
R8: library part CR0603-FX-1912ELF, "RES SMD 19.1K OHM 1% 1/10W 0603", Case/Package=0603, Case Code (Metric)=1608, Manufacturer 1=Bourns, Max Operating Temperature=155°C, Max Power Dissipation=100mW, Min Operating Temperature=-55°C, Package Quantity=5000, Resistance=19.1kR, Temperature Coefficient=100ppm/°C, Tolerance=1%, Voltage Rating=50V, Case Code (Imperial)=0603, ComponentLink1Description=https://datasheet.ciiva.com/5549/chpreztr-5549702.pdf?src-supplier=Mouser, ComponentLink1URL=https://datasheet.ciiva.com/5549/chpreztr-5549702.pdf?src-supplier=Mouser, ComponentLink2Description=https://datasheet.ciiva.com/9121/chpreztr-9121960.pdf?src-supplier=Avnet, ComponentLink2URL=https://datasheet.ciiva.com/9121/chpreztr-9121960.pdf?src-supplier=Avnet, Composition="Thick Film", Contact Plating=Tin, Depth=0.8mm, Features="Moisture Resistant", Height=0.022inch, Length=1.6mm, Manufacturer Part Number 1=CR0603-FX-1912ELF, Military Standard=Not, Mount="Surface Mount", Number of Terminations=2, Packaging="Tape and Reel", Power Rating=100mW, Pricing 1="1=0.10000, 10=0.02000, 100=0.00820, 1000=0.00367, 2500=0.00319 (USD)", Radiation Hardening=No, RoHS=Yes, Stock 1=78916, Supplier 1=Digi-Key, Termination=SMD/SMT, Thickness=457um, Width=0.031inch
R9: library part RC0603FR-07536KL, "RES SMD 536K OHM 1% 1/10W 0603", Case/Package=0603, Case Code (Metric)=1608, Manufacturer 1=Yageo, Max Operating Temperature=155°C, Min Operating Temperature=-55°C, Power Rating=100mW, Resistance=536kR, Temperature Coefficient=100ppm/°C, Tolerance=1%, Voltage Rating=50V, Case Code (Imperial)=0603, ComponentLink1Description=https://datasheet.ciiva.com/8885/pyu-rc0603-51-rohs-l-4-8885383.pdf?src-supplier=Avnet, ComponentLink1URL=https://datasheet.ciiva.com/8885/pyu-rc0603-51-rohs-l-4-8885383.pdf?src-supplier=Avnet, ComponentLink2Description=https://datasheet.ciiva.com/12558/rc0603-272842-12558314.pdf?src-supplier=Mouser, ComponentLink2URL=https://datasheet.ciiva.com/12558/rc0603-272842-12558314.pdf?src-supplier=Mouser, ComponentLink3Description=https://datasheet.ciiva.com/28389/pyu-rc0603-51-rohs-l-4-28389818.pdf?src-supplier=Avnet+Europe, ComponentLink3URL=https://datasheet.ciiva.com/28389/pyu-rc0603-51-rohs-l-4-28389818.pdf?src-supplier=Avnet+Europe, Composition="Thick Film", Contact Plating=Tin,Matte, Height=0.45mm, Lead Free="Lead Free", Length=1.6mm, Manufacturer Part Number 1=RC0603FR-07536KL, Packaging="Tape and Reel", Pricing 1="1=0.10000, 10=0.02400, 100=0.00970, 1000=0.00437, 2500=0.00379 (USD)", RoHS=Yes, Stock 1=45136, Supplier 1=Digi-Key, Termination=SMD/SMT, Voltage Rating (DC)=50V, Width=0.8mm
R22 R23 R24: library part WSL27262L000FEB, "RES SMD 2 MOHM 1% 3W 2726", Case/Package=2726, Case Code (Metric)=6966, Manufacturer 1="Vishay Dale", Max Operating Temperature=170°C, Min Operating Temperature=-65°C, Package Quantity=1000, Power Rating=3W, Resistance=2mR, Temperature Coefficient=75ppm/°C, Tolerance=1%, Case Code (Imperial)=2726, ClassName=FETBridge, ComponentLink1Description=http://www.mouser.com/ds/2/427/wsl2726-88189.pdf?src-supplier=Mouser, ComponentLink1URL=http://www.mouser.com/ds/2/427/wsl2726-88189.pdf?src-supplier=Mouser, ComponentLink2Description=https://media.digikey.com/pdf/Data%20Sheets/Vishay%20Dale%20PDFs/WSL_C_N_F_H_R_Series_EB_Pkg.pdf?src-supplier=Digi-Key, ComponentLink2URL=https://media.digikey.com/pdf/Data%20Sheets/Vishay%20Dale%20PDFs/WSL_C_N_F_H_R_Series_EB_Pkg.pdf?src-supplier=Digi-Key, ComponentLink3Description=http://www.vishay.com/docs/30131/wsl2726.pdf?src-supplier=Digi-Key, ComponentLink3URL=http://www.vishay.com/docs/30131/wsl2726.pdf?src-supplier=Digi-Key, Composition="Metal Strip", Height=3mm, Length=6.9mm, Manufacturer Part Number 1=WSL27262L000FEB, Packaging="Tape and Reel", Pricing 1="1=2.51000, 10=2.22300, 25=2.06160, 50=1.94040, 100=1.69790, 250=1.45532, 500=1.21276 (USD)", RoHS=Yes, Stock 1=5164, Supplier 1=Digi-Key, Termination=SMD/SMT, Width=6.6mm
R25: library part RC0603JR-07470RL, "RES SMD 470 OHM 5% 1/10W 0603", Case/Package=0603, Case Code (Metric)=1608, Manufacturer=Yageo, Max Operating Temperature=155°C, Max Power Dissipation=100mW, Min Operating Temperature=-55°C, Package Quantity=1, Resistance=470R, Temperature Coefficient=100ppm/°C, Tolerance=5%, Voltage Rating=50V, Case Code (Imperial)=0603, ClassName=FETBridge, ComponentLink1Description=http://www.yageo.com/documents/recent/PYu-RC_Group_51_RoHS_L_10.pdf, ComponentLink1URL=http://www.yageo.com/documents/recent/PYu-RC_Group_51_RoHS_L_10.pdf, ComponentLink2Description=http://www.farnell.com/datasheets/443971.pdf, ComponentLink2URL=http://www.farnell.com/datasheets/443971.pdf, Composition="Thick Film", Depth=0.8mm, Features="Moisture Resistant", Height=0.022inch, Lead Free="Lead Free", Length=0.063inch, Manufacturer Part Number=RC0603JR-07470RL, Military Standard=Not, Number of Pins=2, Number of Terminations=2, Packaging="Tape and Reel", Power Rating=100mW, Pricing 1="1 = 0.10000, 10 = 0.02000, 100 = 0.00810, 1000 = 0.00362, 2500 = 0.00314 (USD)", REACH SVHC="No SVHC", RoHS=Yes, Stock 1=12870080, Supplier 1=Digi-Key, Termination=SMD/SMT, Voltage Rating (DC)=50V, Width=0.031inch
R27: library part CMP-2000-03454-1, Manufacturer="Vishay Dale", Part Number=CRCW060353K6FKEA, ClassName="5V Regulator"
R29: library part CMP-2000-05022-1, "Resistor, 10 KOhm, +/- 5%, 100 mW, -55 to 155 degC, 0603 (1608 Metric), RoHS, Tape and Reel", Case Code - in=0603, Case Code - mm=1608, Manufacturer=Yageo, Operating Temperature Range=-55Cto+155C, Package Description="2-Pin Surface Mount Device, Body 1.6 x 0.8 mm", Package Reference=603, Power Rating=100mW, Resistance=10kOhms, Temperature Coefficient=100PPM/C, Tolerance=5%, Voltage Rating=50V, ClassName="5V Regulator", Datasheet URL=http://www.farnell.com/datasheets/443971.pdf, Datasheet Version="Rev. 4, 04/2009", Manufacturer URL=http://www.yageo.com/, Packaging=Reel, Product=ThickFilmResistorsGeneralPurpose, Series=RC, Termination Style=SMD/SMT
R30 R49: library part RMCF0603FT28K0, "RES SMD 28K OHM 1% 1/10W 0603", Case/Package=0603, Case Code (Metric)=1608, Manufacturer 1="Stackpole Electronics", Max Operating Temperature=155°C, Max Power Dissipation=100mW, Min Operating Temperature=-55°C, Resistance=28kR, Temperature Coefficient=100ppm/°C, Tolerance=1%, Case Code (Imperial)=0603, ComponentLink1Description=https://www.seielect.com/Catalog/SEI-RMCF_RMCP.pdf?src-supplier=Digi-Key, ComponentLink1URL=https://www.seielect.com/Catalog/SEI-RMCF_RMCP.pdf?src-supplier=Digi-Key, ComponentLink2Description=https://www.seielect.com/catalog/SEI-Packaging.pdf?src-supplier=Digi-Key, ComponentLink2URL=https://www.seielect.com/catalog/SEI-Packaging.pdf?src-supplier=Digi-Key, ComponentLink3Description=http://components.arrow.com/part/dataview/50505137S2698N1174?src-supplier=Arrow, ComponentLink3URL=http://components.arrow.com/part/dataview/50505137S2698N1174?src-supplier=Arrow, ComponentLink4Description=https://www.seielect.com/catalog/SEI-RMCF_RMCP.pdf?src-supplier=Avnet, ComponentLink4URL=https://www.seielect.com/catalog/SEI-RMCF_RMCP.pdf?src-supplier=Avnet, ComponentLink5Description=http://www.seielect.com/Catalog/SEI-RMC.pdf?src-supplier=Future+Electronics, ComponentLink5URL=http://www.seielect.com/Catalog/SEI-RMC.pdf?src-supplier=Future+Electronics, Composition="Thick Film", Contact Plating=Tin,Matte, Features="Automotive AEC-Q200", Height=0.022inch, Lead Free="Lead Free", Length=0.061inch, Manufacturer Part Number 1=RMCF0603FT28K0, Mount="Surface Mount", Number of Terminations=2, Packaging="Tape and Reel", Power Rating=100mW, Pricing 1="1=0.10000, 10=0.01700, 100=0.00680, 1000=0.00306, 2500=0.00266 (USD)", Radiation Hardening=No, RoHS=Yes, Stock 1=126187, Supplier 1=Digi-Key, Width=0.031inch
  R30: ClassName="3.3V Regulator"
R31: library part CMP-2000-00492-1, Manufacturer=Panasonic, Part Number=ERJ-3EKF4123V, ClassName="5V Regulator"
R32: library part CMP-2000-07452-1, "Chip Resistor, 10 KOhm, +/- 1%, 0.1 W, -55 to 155 degC, 0603 (1608 Metric), RoHS, Tape and Reel", Case\/Package=0603, Case Code (Metric)=1608, Manufacturer=Panasonic, Max Operating Temperature=155degC, Max Power Dissipation=100mW, Min Operating Temperature=-55degC, Package Description="2-Pin Surface Mount Device, Body 1.6 x 0.85 mm", Package Quantity=1, Package Reference=603, Resistance=10KOhm, Temperature Coefficient=100ppm\/degreesC, Tolerance=1%, Voltage Rating=75V, Case Code (Imperial)=0603, ClassName="5V Regulator", Composition=ThickFilm, Contact Plating=Tin, Datasheet URL=https://industrial.panasonic.com/cdbs/www-data/pdf/RDA0000/AOA0000C304.pdf, Datasheet Version=02/2017, Depth=0.8mm, Height=0.45mm, Lead Free=LeadFree, Length=1.6mm, Manufacturer URL=http://www.panasonic.com/, Military Standard=Not, Mount=SurfaceMount, Mounting Technology=SurfaceMount, Number of Pins=2, Number of Terminations=2, Packaging=TapeandReel, Power Rating=100mW, Radiation Hardening=No, REACH SVHC=NoSVHC, RoHSCompliant=true, Termination=SMD/SMT, Voltage Rating (DC)=75V, Width=0.031inch
R33: library part CMP-2000-00228-1, Manufacturer=Panasonic, Part Number=ERJ-3EKF1272V, ClassName="5V Regulator"
R34: library part RC0603FR-078K45L, "RES SMD 8.45K OHM 1% 1/10W 0603", Case/Package=Molded, Case Code (Imperial)=0603, Case Code (Metric)=1608, Manufacturer 1=Yageo, Max Operating Temperature=155°C, Min Operating Temperature=-55°C, Power Rating=100mW, Resistance=8.45kR, Temperature Coefficient=100ppm/°C, Tolerance=1%, Voltage Rating=50V, ClassName="3.3V Regulator", ComponentLink1Description=http://www.mouser.com/ds/2/447/RC0603-272842.pdf?src-supplier=Mouser, ComponentLink1URL=http://www.mouser.com/ds/2/447/RC0603-272842.pdf?src-supplier=Mouser, ComponentLink2Description=http://components.arrow.com/part/dataview/0323_03543311?src-supplier=Arrow+Europe, ComponentLink2URL=http://components.arrow.com/part/dataview/0323_03543311?src-supplier=Arrow+Europe, ComponentLink3Description=https://www.verical.com/server-webapp/html/getDatasheet?partID=329317&src-supplier=Verical, ComponentLink3URL=https://www.verical.com/server-webapp/html/getDatasheet?partID=329317&src-supplier=Verical, ComponentLink4Description=http://www.yageo.com/documents/recent/PYu-RC_Group_51_RoHS_L_9.pdf?src-supplier=Digi-Key, ComponentLink4URL=http://www.yageo.com/documents/recent/PYu-RC_Group_51_RoHS_L_9.pdf?src-supplier=Digi-Key, ComponentLink5Description=http://www.yageo.com/documents/recent/PYu-RC0603_51_RoHS_L_7.pdf?src-supplier=Future+Electronics, ComponentLink5URL=http://www.yageo.com/documents/recent/PYu-RC0603_51_RoHS_L_7.pdf?src-supplier=Future+Electronics, Composition="Thick Film", Depth=0.8mm, Lead Free="Lead Free", Length=1.6mm, Manufacturer Part Number 1=RC0603FR-078K45L, Military Standard=Not, Packaging="Tape and Reel", Pricing 1="1=0.10000, 10=0.02400, 100=0.00970, 1000=0.00437, 2500=0.00379 (USD)", RoHS=Yes, Stock 1=1203753, Supplier 1=Digi-Key, Termination=SMD/SMT, Voltage Rating (DC)=50V
R35 R46: library part CMP-2000-03356-1, Manufacturer="Vishay Dale", Part Number=CRCW060343R0JNEA
R38: library part CMP-2000-00986-1, Manufacturer="KOA Speer", Part Number=RK73B1JTTD431J
R50 R52 R54: library part CMP-2000-00697-1, Manufacturer=Panasonic, Part Number=ERJ-3EKF9762V
R51 R53 R55: library part RT0603BRD074K99L, "RES SMD 4.99K OHM 0.1% 1/10W", Case/Package=0603, Case Code (Metric)=1608, Manufacturer 1=Yageo, Max Operating Temperature=125°C, Max Power Dissipation=100mW, Min Operating Temperature=-55°C, Package Quantity=5000, Resistance=4.99kR, Temperature Coefficient=25ppm/°C, Tolerance=0.1%, Voltage Rating=75V, Voltage Rating (DC)=50V, Case Code (Imperial)=0603, ComponentLink1Description=https://datasheet.ciiva.com/2585/pyu-rt-1-to-0-05-rohs-l-4-2585984.pdf?src-supplier=Digi-Key, ComponentLink1URL=https://datasheet.ciiva.com/2585/pyu-rt-1-to-0-05-rohs-l-4-2585984.pdf?src-supplier=Digi-Key, ComponentLink2Description=https://datasheet.ciiva.com/46635/pyu-rt-1-to-0-05-rohs-l-5-46635030.pdf?src-supplier=Digi-Key, ComponentLink2URL=https://datasheet.ciiva.com/46635/pyu-rt-1-to-0-05-rohs-l-5-46635030.pdf?src-supplier=Digi-Key, ComponentLink3Description=https://datasheet.ciiva.com/12836/pyu-rt-1-to-0-05-rohs-l-4-12836462.pdf?src-supplier=Mouser, ComponentLink3URL=https://datasheet.ciiva.com/12836/pyu-rt-1-to-0-05-rohs-l-4-12836462.pdf?src-supplier=Mouser, Composition="Thin Film", Contact Plating=Tin,Matte, Depth=0.8mm, Features="Moisture Resistant", Height=0.022inch, Lead Free="Lead Free", Length=1.6mm, Manufacturer Part Number 1=RT0603BRD074K99L, Military Standard=Not, Number of Terminations=2, Packaging="Tape and Reel", Power Rating=100mW, Pricing 1="1=0.37000, 10=0.31200, 100=0.12190, 1000=0.05103, 2500=0.04678 (USD)", Radiation Hardening=No, RoHS=Yes, Stock 1=53078, Supplier 1=Digi-Key, Termination=SMD/SMT, Weight=7.1E-05oz, Width=0.031inch
TP1 TP2 TP3 TP4 TP5 TP6 TP7 TP8 TP9 TP10 TP11 TP12 TP13 TP14 TP15 TP16 TP17 TP18 TP19 TP20 TP21 TP22 TP23 TP24 TP25 TP26 TP27 TP28 TP29 TP30 TP31 TP32 TP33 TP34 TP38 TP39 TP40 TP41: library part CMP-2000-05183-1, "Test Point, White, SMT", Manufacturer=Keystone, Contact Plating=Silver, Datasheet URL=https://datasheet.ciiva.com/1123/5015-1123862.pdf, Datasheet Version=Mar-14, Finish Plating=SilverPlate, Height=0.06In., Length="0.105\"(2.667mm)", Manufacturer URL=http://www.keyelco.com/, Material=PhosphorBronze, Material, Contact=PhosphorBronze, Mounting=SurfaceMount, Mounting Type=SurfaceMount, Primary Type=PCBTestPoints, Style=Miniature, Termination=SMT, Thickness=0.010In., Type=TestPointsonTapeandReel
  TP32 TP33 TP34 TP38 TP39: ClassName=FETBridge
TP35 TP36 TP37: library part CMP-2000-05182-1, "Test Point, White, 1-Pin THD, RoHS, Bulk", Color=White, Manufacturer=KeystoneElectronics, Brand=KeystoneElectronics, ClassName=FETBridge, Contact Material=PhosphorBronze, Datasheet URL=https://ciiva.com/datasheet-click-2917627?src=ciiva&sig=bd195616, Datasheet Version="Rev. G, 12/2008", Length=7.62mm, Manufacturer URL=http://www.keyelco.com/, Material=Nylon, Mounting Hole Size=1mm, Outside Diameter=2.54mm, Packaging=Bulk, Plating=Silver, Product=TestPoints, Product Category=CircuitBoardHardware-PCB, RoHS=True, Type=Miniature
TP42 TP43 TP44 TP47 TP48 TP50: library part CMP-1672-00003-4, "Test Point, Black, Through Hole, RoHS, Bulk", Colour=Black, Manufacturer=Keystone, Package Quantity=100, ComponentLink1Description="Manufacturer URL", ComponentLink1URL=http://www.keyelco.com/, ComponentLink2Description=Datasheet, ComponentLink2URL=http://www.keyelco.com/product-pdf.cfm?p=1320, Contact Material=Bronze, Contact Plating=Silver, DatasheetVersion="Rev. F, 12/2013", Height="8.12 mm", Mount="Through Hole", Mounting Technology="Through Hole", PackageDescription="1-Pin Through Hole Device, Dia 3.17 mm", PackageReference=5011, Packaging=Bulk, Pins=1, REACH SVHC="No SVHC", RoHSCompliant=true
  TP42 TP43 TP44: ClassName=FETBridge
  TP47: ClassName="5V Regulator"
TP45: library part CMP-2000-05575-1, "Test Point, Yellow, 1-Pin THD, RoHS, Bulk", Manufacturer=Keystone, Package Description="1-Pin Through Hole Device, Dia 2.54 mm", ClassName="5V Regulator", Datasheet URL=http://www.keyelco.com/product-pdf.cfm?p=1313, Datasheet Version="Rev. G, 12/2008", Manufacturer URL=http://www.keyelco.com/, Mounting Technology=ThroughHole, Package Reference=5004
TP46: library part CMP-1672-00005-4, "Test Point, Orange, Through Hole, RoHS, Bulk", Colour=Orange, Manufacturer=Keystone, Package Quantity=100, ClassName="3.3V Regulator", ComponentLink1Description="Manufacturer URL", ComponentLink1URL=http://www.keyelco.com/, ComponentLink2Description=Datasheet, ComponentLink2URL=http://www.keyelco.com/product-pdf.cfm?p=1322, Contact Material=Bronze, Contact Plating=Silver, DatasheetVersion="Rev. F, 12/2013", Height="8.12 mm", Mount="Through Hole", Mounting Technology="Through Hole", PackageDescription="1-Pin Through Hole Device, Dia 3.17 mm", PackageReference=5013, Packaging=Bulk, REACH SVHC="No SVHC", RoHSCompliant=True
TP49: library part CMP-1672-00009-1, "Test Point, Orange, 1-Pin THD, RoHS", Forward Current="3 A", Forward Voltage="1.08 V", Max Operating Temperature="150 degC", Max Surge Current="80 A", Min Operating Temperature="-65 degC", Package Quantity=500, Peak Reverse Current="600 uA", ComponentLink1Description="Manufacturer URL", ComponentLink1URL=http://www.keyelco.com/, ComponentLink2Description=Datasheet, ComponentLink2URL=http://keyelco.com/userAssets/file/M65p56.pdf, DatasheetVersion=Jun-15, Diameter="5.3 mm", Height="0.25 inch", Length="9.5 mm", Mount="Through Hole", PackageDescription="1-Pin Through Hole Device, Dia 2.54 mm", PackageReference=5003, Packaging=Bulk, Pins=2, Radiation Hardening=No, REACH SVHC="No SVHC", RoHSCompliant=true, Weight="0.01 lb", Width="0.25 inch"
U1 U7: library part CMP-0859-00971-3, "Single Power Supply Quadruple Buffer GATE w/ 3-State Output CMOS Logic Level Shifter, PW0014A, LARGE T&R", F @ Nom Voltage(Max)(Mhz)=50, Generic Part Number=SN74LV4T125, ICC @ Nom Voltage(Max)(mA)=0.02, Manufacturer="Texas Instruments", Operating Temperature Range(C)="-40 to 125", Rating=Catalog, tpd @ Nom Voltage(Max)(ns)=12,7,5.5,3.5, Voltage(Nom)(V)=1.8,2.5,3.3,5, 3-State Output=Yes, Bits(#)=4, DatasheetVersion=SCLS749B, Input Type=CMOS/TTL, Logic=True, Output Drive (IOL/IOH)(Max)(mA)=16/-16, Output Type=CMOS, PackageReference=PW0014A, Schmitt Trigger=No, Sub-Family="Single Supply Translator", Technology Family=LV-A, VCC(Max)(V)=5.5, VCC(Min)(V)=1.6